# Altium PCB Watchdog PCB.PcbDoc
Units mm, origin at the board's own origin, x right, y up, seen from the top; angles counter-clockwise.
Board outline 100.02 x 60.03 mm, 4 copper layers (SIG 1, GND, PWR, SIG 2), stack 1.586 mm thick; 43 components, 51 nets, 433 pads, 105 vias.
Unrouted connection lines stored in the file: 85.
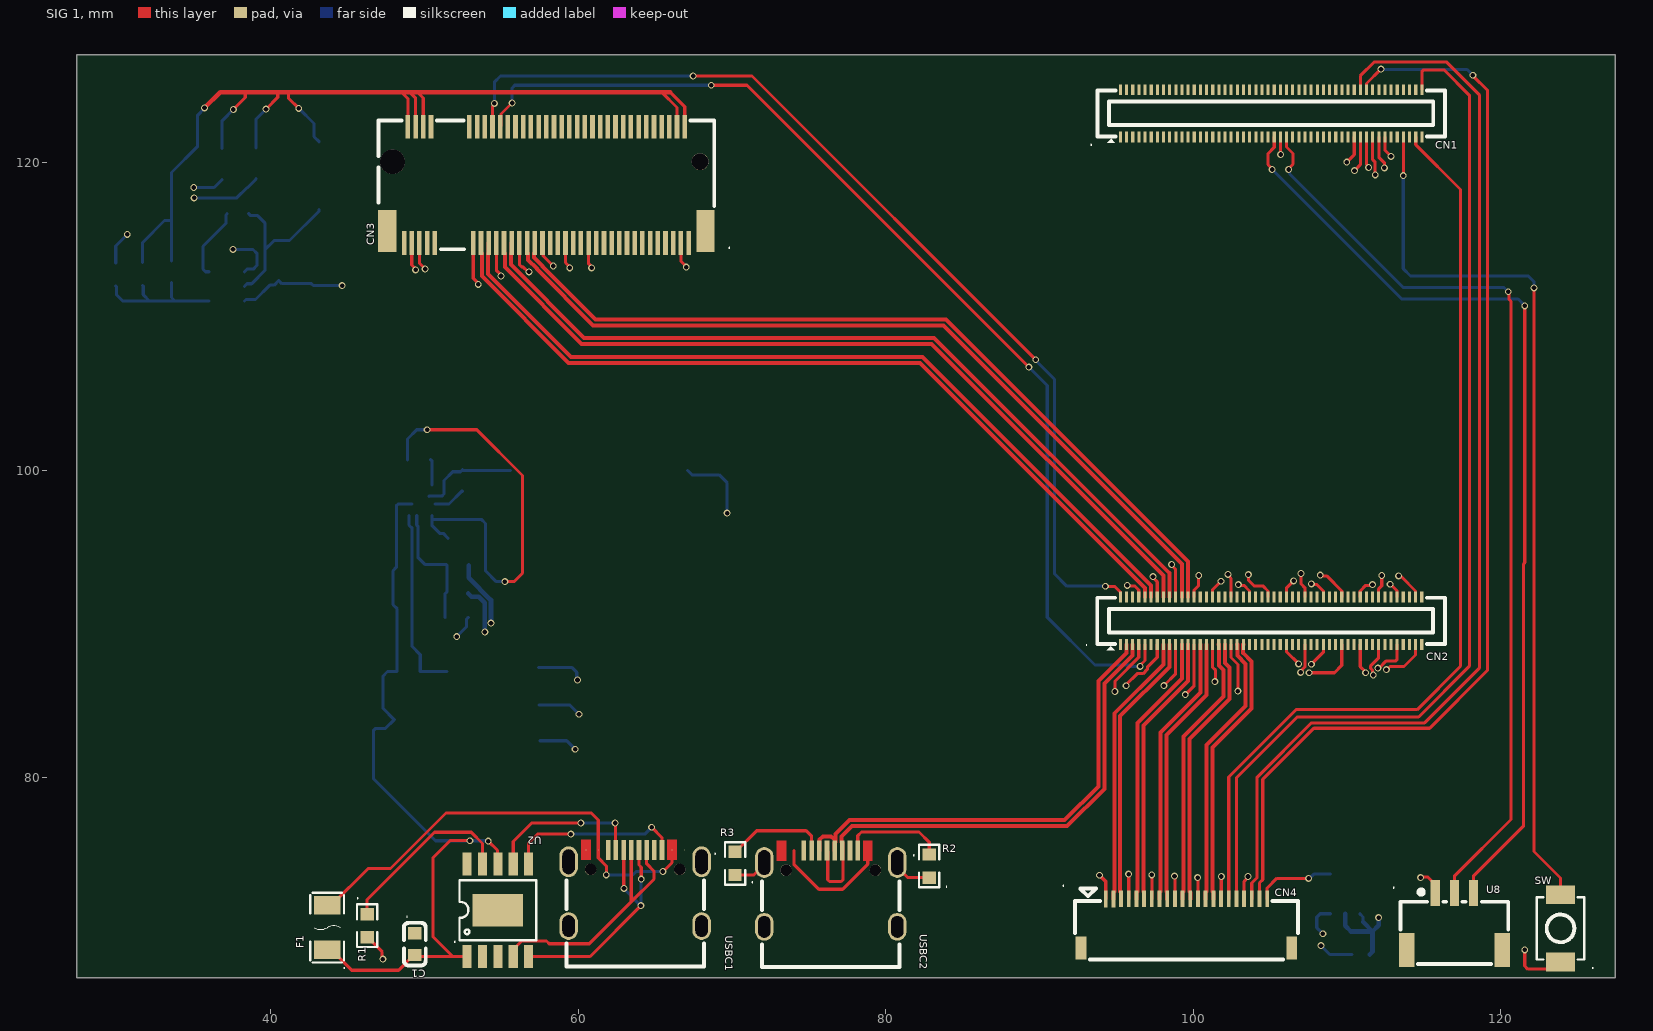
[diagram p0: SIG 1 view]
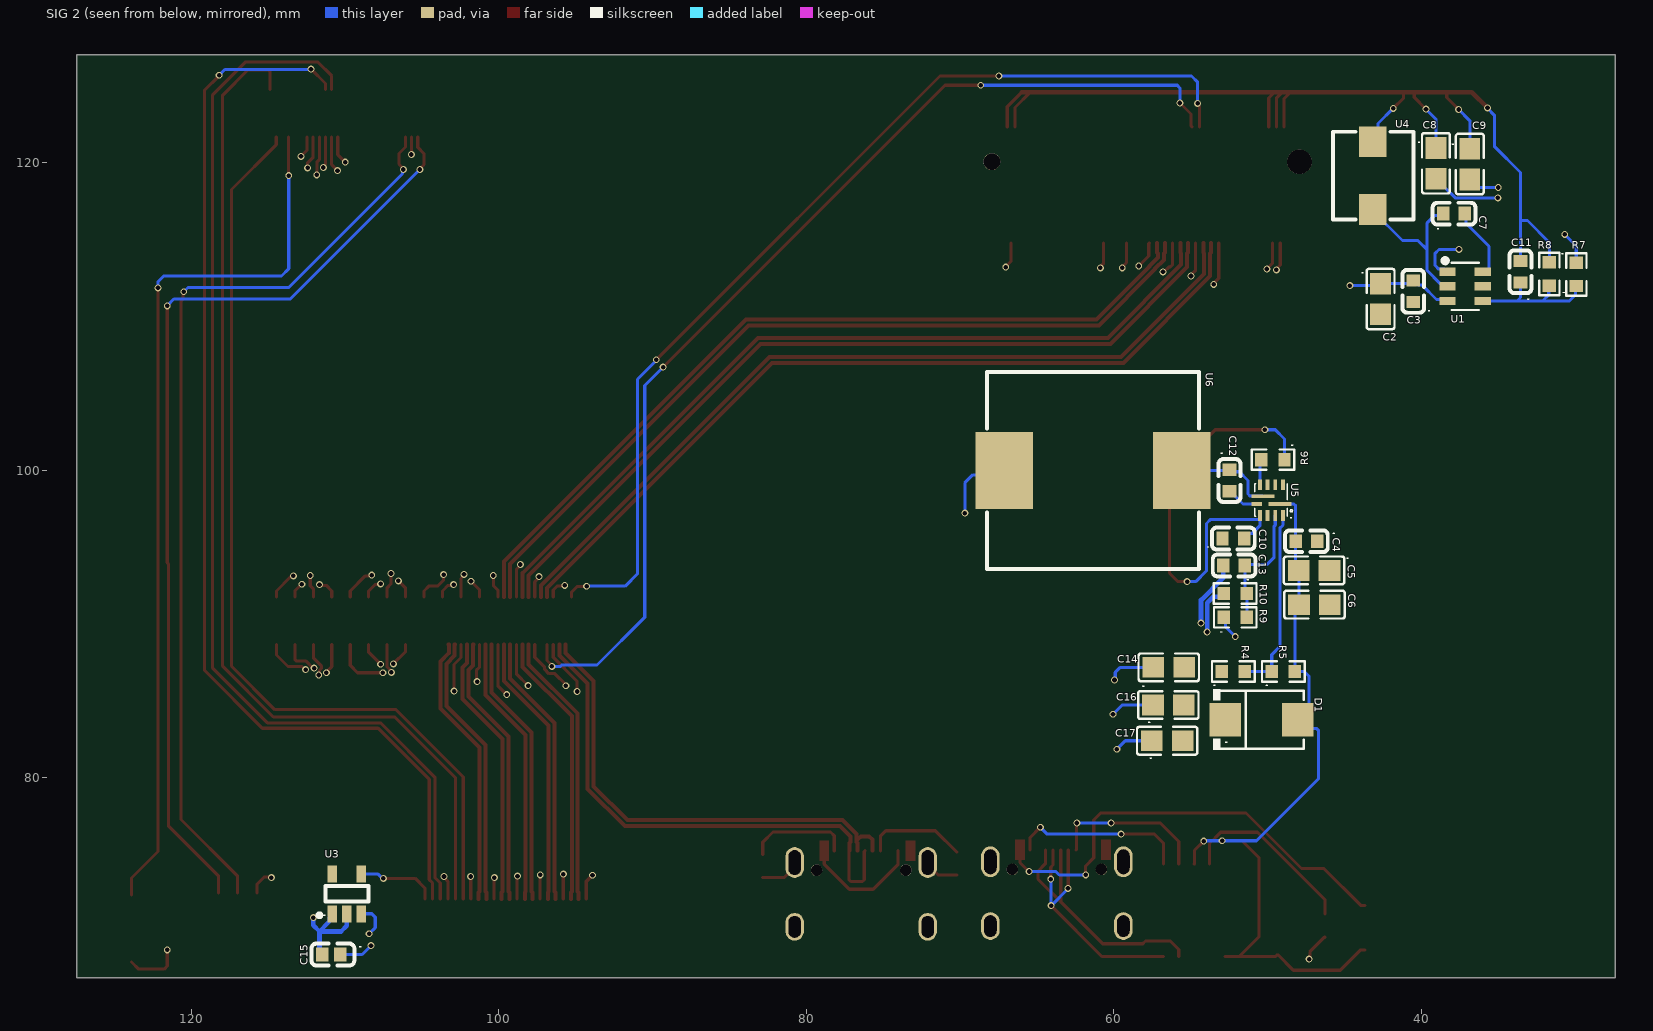
[diagram p1: SIG 2 view, seen from below]
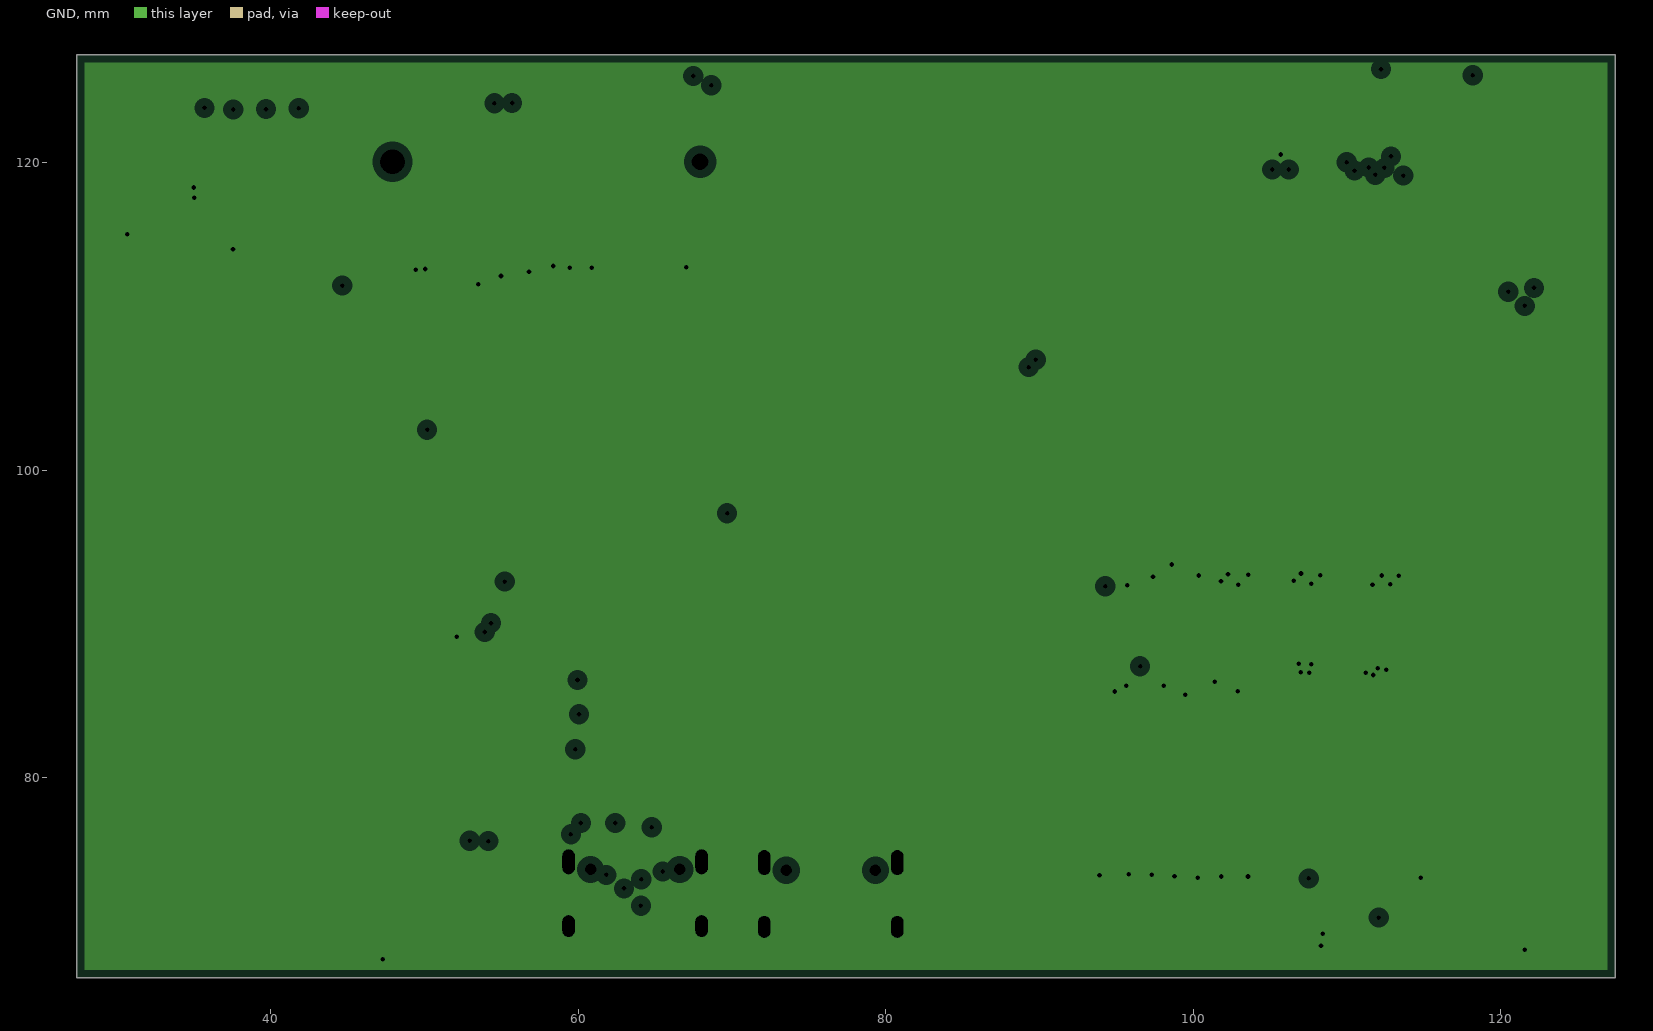
[diagram p2: GND, clearances drawn from the general rule]
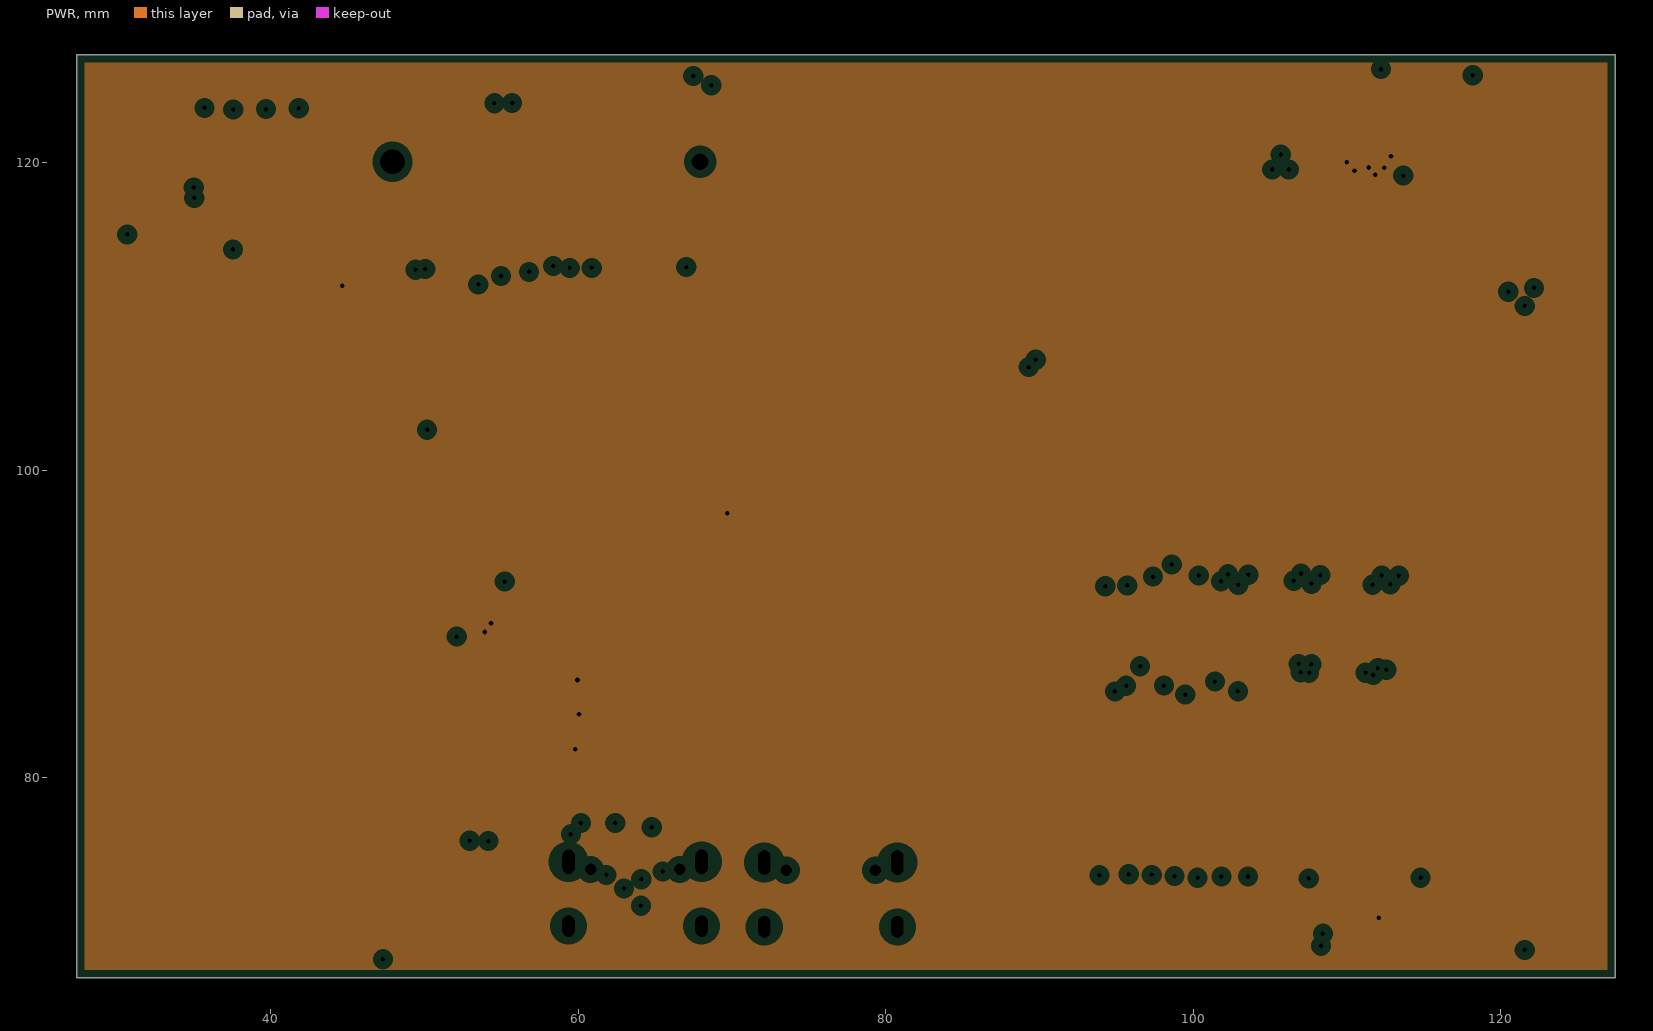
[diagram p3: PWR, clearances drawn from the general rule]
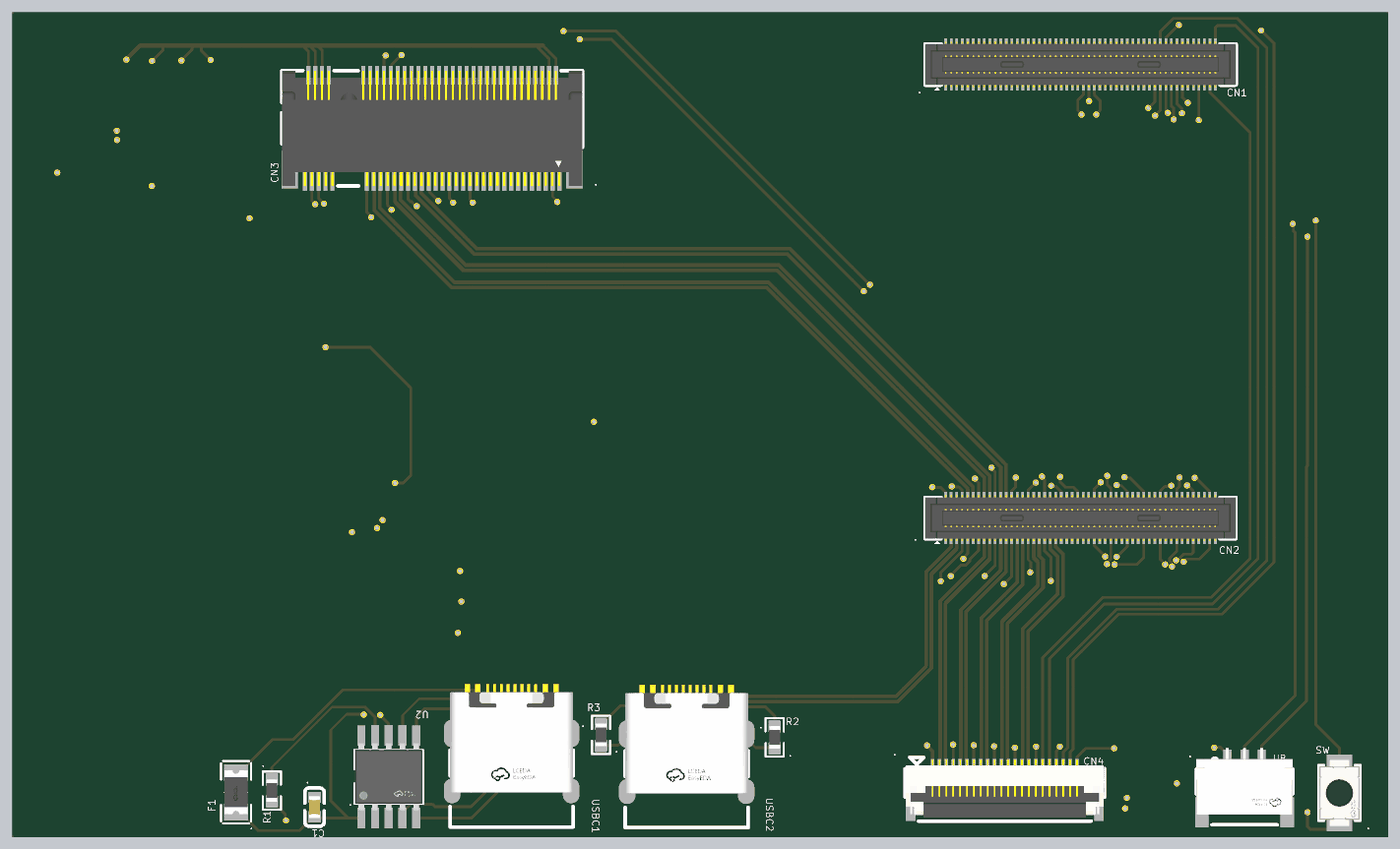
[diagram p4: 3D render of the assembled board from above, using the file's embedded part models]
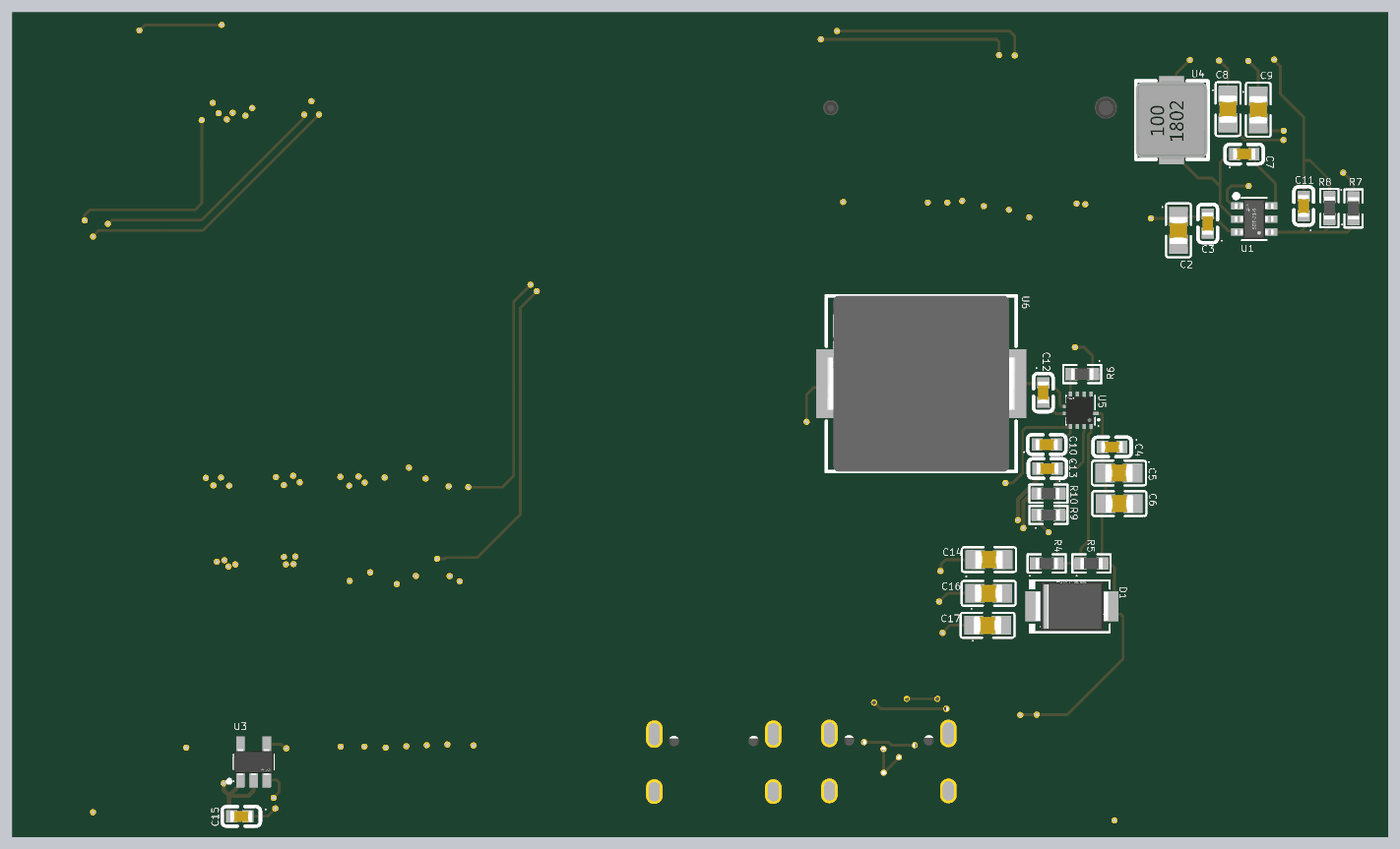
[diagram p5: 3D render of the assembled board from below, using the file's embedded part models]

## Layer stack, top to bottom
Top Solder: solder mask 0.0102, Solder Resist, Dk 3.5
SIG 1: signal copper 0.035
Dielectric 2: prepreg 0.2104, PP-006, Dk 4.1
GND: plane copper 0.0152, net GND
Dielectric 1: dielectric 1.065, FR-4, Dk 4.8
PWR: plane copper 0.0152, net 5V
Dielectric 3: prepreg 0.2104, PP-006, Dk 4.1
SIG 2: signal copper 0.035
Bottom Solder: solder mask 0.0102, Solder Resist, Dk 3.5

## Board outline
27.4,66.975 127.425,66.975 127.425,127 27.4,127

## Design rules (kind name [scope] priority, off if disabled: settings)
Clearance [All] p1: gap=0.15 ignorepadtopadclearanceinfootprint=TRUE
DiffPairsRouting USB_DiffPair [All] p1: maxlimit=0.127 minlimit=0.127 mostfreqgap=0.127 toplayer_minwidth=0.26 toplayer_maxwidth=0.26 toplayer_prefwidth=0.26 bottomlayer_minwidth=0.26 bottomlayer_maxwidth=0.26 bottomlayer_prefwidth=0.26 impedanceprofiledriven=TRUE impedanceprofileid={312E05CD-DBFE-4CD3-A864-9E920D600580} impedanceprofilevalue=90.000000 maxuncoupledlength=12.7
DiffPairsRouting [All] p2: maxlimit=0.254 minlimit=0.254 mostfreqgap=0.254 toplayer_minwidth=0.381 toplayer_maxwidth=0.381 toplayer_prefwidth=0.381 bottomlayer_minwidth=0.381 bottomlayer_maxwidth=0.381 bottomlayer_prefwidth=0.381 maxuncoupledlength=12.7
MinimumSolderMaskSliver [All] p1: minsoldermaskwidth=0.05
PlaneClearance [All] p1: clearance=0.508
PlaneConnect [All] p1: planeconnectstyle=Direct reliefexpansion=0.508 reliefentries=4 reliefconductorwidth=0.254 reliefairgap=0.254
PolygonConnect [All] p1: connectstyle=Direct reliefconductorwidth=0.254 reliefentries=4 polygonreliefangle="90 Angle" airgapwidth=0.254
RoutingVias [All] p1: holewidth=0.3 width=0.45 viastyle="Through Hole" minholewidth=0.3 minwidth=0.45 maxholewidth=0.3 maxwidth=0.6
SilkToSilkClearance [All] p1: silktosilkclearance=0.15
SilkToSolderMaskClearance [IsPad] p1: minsilkscreentomaskgap=0.1 clearancetoexposedcopper=TRUE
SolderMaskExpansion [All] p1: expansion=0 istentingtop=FALSE
SupplyNets "Schematic Supply Nets" [InNet('GND')] p1: voltage=0.000
Width [All] p1: maxlimit=0.5 minlimit=0.2 preferedwidth=0.2
24 further rules are at their usual default settings.

## Classes and differential pairs
component class USBC_Protection: C1 F1 R1 R2 R3 U2 USBC1 USBC2
component class "Power Rails": C2 C3 C4 C5 C6 C7 C8 C9 C10 C11 C12 C13 C14 C15 C16 C17 D1 R4 R5 R6 R7 R8 R9 R10 U1 U3 U4 U5 U6
component class "M.2 & CSI2": CN3 CN4
component class "Amphenol ICC": CN1 CN2 SW U8
differential pair PCIE_TX: +PCIE_TX_P -PCIE_TX_N
differential pair PCIE_RX: +PCIE_RX_P -PCIE_RX_N
differential pair PCIE_CLK: +PCIE_CLK_P -PCIE_CLK_N
differential pair CAM_D3: +CAM_D3_P -CAM_D3_N
differential pair CAM_D2: +CAM_D2_P -CAM_D2_N
differential pair CAM_D1: +CAM_D1_P -CAM_D1_N
differential pair CAM_D0: +CAM_D0_P -CAM_D0_N
differential pair CAM_CLK: +CAM_CLK_P -CAM_CLK_N
differential pair USB: +USB_P -USB_N

## Components (designator, comment, footprint, x,y, rotation, side; value= is the part's Value field where it differs from the comment)
C1 "CL10A105KB8NNNC" C0603#1 49.375,69.175 r270 top value=1uF
C2 "CL21A226MAQNNNE" C0805 42.65,111.125 r270 bottom value=22uF
C3 "CC0603KRX7R9BB104" C0603#1 40.525,111.625 r90 bottom value=100nF
C4 "C0603X7R104K250NT" C0603#1 47.475,95.375 r0 bottom value=100nF
C5 "CL21A226MAQNNNE" C0805 46.975,93.475 r0 bottom value=22uF
C6 "CL21A226MAQNNNE" C0805 46.95,91.25 r0 bottom value=22uF
C7 "CC0603KRX7R9BB104" C0603#1 37.875,116.675 r180 bottom value=100nF
C8 "CL21A226MAQNNNE" C0805 39.05,119.95 r270 bottom value=22uF
C9 "CL21A226MAQNNNE" C0805 36.85,119.9 r270 bottom value=22uF
C10 "CL10A105KB8NNNC" C0603#1 52.225,95.55 r180 bottom value=1uF
C11 "CL10C470JB8NNNC" C0603#1 33.55,112.9 r90 bottom value=47pF
C12 "CL10B224KA8NNNC" C0603#1 52.475,99.325 r270 bottom value=220nF
C13 "TCC0603COG330F500CT" C0603#1 52.175,93.8 r0 bottom value=33pF
C14 "CL21A226MAQNNNE" C0805 56.425,87.175 r180 bottom value=22uF
C15 "CL10A105KB8NNNC" C0603#2 110.775,68.5 r0 bottom value=1uF
C16 "CL21A226MAQNNNE" C0805 56.45,84.725 r180 bottom value=22uF
C17 "CL21A226MAQNNNE" C0805 56.525,82.4 r180 bottom value=22uF
CN1 "10164227-1001A1RLF" CONN-SMD_100P-P0.40_10164227-1001A1RLF 105.06,123.197 r0 top
CN2 "10164227-1001A1RLF" CONN-SMD_100P-P0.40_10164227-1001A1RLF 105.05,90.2 r0 top
CN3 "91302-42-067RDM" CONN-SMD_91302-32-067RDM 57.925,118.55 r180 top
CN4 "CSI Connector" FPC-SMD_22P-P0.50_FH55-22S-0.5SH 99.55,70.524 r0 top
D1 "TVS" SMB_L4.6-W3.6-LS5.3-RD 50.4,83.775 r180 bottom
F1 "Fuse" F1206 43.675,70.25 r90 top
R1 "CQ03WAJ0682T5E" R0603 46.275,70.378 r270 top value=6.8k
R2 "0603WAF5101T5E" R0603 82.825,74.25 r90 top value=5.1K
R3 "0603WAF5101T5E" R0603 70.2,74.425 r90 top value=5.1K
R4 "0603WAF1003T5E" R0603 52.228,86.9 r180 bottom value=100k
R5 "0603WAF4533T5E" R0603 48.975,86.9 r180 bottom value=453k
R6 "0603WAF1003T5E" R0603 49.65,100.675 r0 bottom value=100k
R7 "RT0603BRD0722K1L" R0603 29.925,112.725 r270 bottom value=22.1k
R8 "0603WAF1003T5E" R0603 31.675,112.75 r90 bottom value=100k
R9 "FRQ0603F5491TS" R0603 52.1,90.425 r180 bottom value=5.49k
R10 "0603WAF4022T5E" R0603 52.103,91.975 r0 bottom value=40.2k
SW "TS-1088R-02026" SW-SMD_L3.9-W3.0-P4.45 123.875,70.2 r270 top
U1 "TPS54302DDCR" SOT-23-6_L2.9-W1.6-P0.95-LS2.8-BL 37.15,111.95 r270 bottom
U2 "CH224A" ESSOP-10_L4.9-W3.9-P1.0-LS6.0-TL-EP 54.775,71.375 r0 top
U3 "AP2112K-3.3TRG1" SOT-25-5_L2.9-W1.6-P0.95-LS2.8-BL 109.875,72.45 r180 bottom
U4 "CXP0530-6R8M-AG(6.8uh)" IND-SMD_L5.7-W5.2 43.15,119.15 r90 bottom value=6.8uH
U5 "MP2329GG-Z" QFN-11_L2.0-W2.0-P0.50_MP2384CGG-Z 49.851,98.05 r0 bottom
U6 "CYA1250-3.3UH" IND-SMD_L13.8-W12.8 61.35,99.975 r0 bottom value=3.3uH
U8 "UART" CONN-TH_SM03B-GHS-TB-LF-SN 116.975,70.65 r0 top
USBC1 "TYPE-C-31-M-12" USB-C_SMD-TYPE-C-31-M-12_1 63.7,72.825 r0 top
USBC2 "TYPE-C-31-M-12" USB-C_SMD-TYPE-C-31-M-12_1 76.425,72.775 r0 top

## Footprints (in the part's own frame and the unit in brackets; to place one, negate y for a bottom-side part, rotate by r counter-clockwise, add the part's x,y. Pads: shape width x height; smd on the part's side, far side on the other; paste and mask are expansions set on the pad)
C0603#1 [mm] "1uF ±10% 50V Ceramic Capacitor X5R 0603"
  rect 0.8x0.9 smd: 1(-0.7,0) 2(0.7,0)
  silkscreen extent -1.81,-0.71 1.39,0.71, body extent -1.3,-0.53 0.3,0.27, height 0.03
C0603#2 [mm] "1uF ±10% 50V Ceramic Capacitor X5R 0603"
  rect 0.8x0.9 smd: 1(-0.475,0) 2(0.7,0)
  silkscreen extent -1.81,-0.71 1.39,0.71, body extent -0.8,-0.4 0.8,0.4, height 0.4
C0805 [mm] "22uF ±20% 25V Ceramic Capacitor X5R 0805"
  rect 1.41x1.35 smd: 1(-1,0) 2(1,0)
  silkscreen extent -1.96,-1.2 1.96,0.9, body extent -1,-0.65 1,0.65, height 0.65
CONN-SMD_100P-P0.40_10164227-1001A1RLF [mm] "100 Position Board to Board Connector Surface Mount,P=0.4mm Gold"
  rect 0.2x0.7 smd: 1(-9.8,-1.54) 2(-9.8,1.54) 3(-9.4,-1.54) 4(-9.4,1.54) 5(-9,-1.54) 6(-9,1.54) 7(-8.6,-1.54) 8(-8.6,1.54) 9(-8.2,-1.54) 10(-8.2,1.54) 11(-7.8,-1.54) 12(-7.8,1.54) 13(-7.4,-1.54) 14(-7.4,1.54) 15(-7,-1.54) 16(-7,1.54) 17(-6.6,-1.54) 18(-6.6,1.54) 19(-6.2,-1.54) 20(-6.2,1.54) 21(-5.8,-1.54) 22(-5.8,1.54) 23(-5.4,-1.54) 24(-5.4,1.54) 25(-5,-1.54) 26(-5,1.54) 27(-4.6,-1.54) 28(-4.6,1.54) 29(-4.2,-1.54) 30(-4.2,1.54) 31(-3.8,-1.54) 32(-3.8,1.54) 33(-3.4,-1.54) 34(-3.4,1.54) 35(-3,-1.54) 36(-3,1.54) 37(-2.6,-1.54) 38(-2.6,1.54) 39(-2.2,-1.54) 40(-2.2,1.54) 41(-1.8,-1.54) 42(-1.8,1.54) 43(-1.4,-1.54) 44(-1.4,1.54) 45(-1,-1.54) 46(-1,1.54) 47(-0.6,-1.54) 48(-0.6,1.54) 49(-0.2,-1.54) 50(-0.2,1.54) 51(0.2,-1.54) 52(0.2,1.54) 53(0.6,-1.54) 54(0.6,1.54) 55(1,-1.54) 56(1,1.54) 57(1.4,-1.54) 58(1.4,1.54) 59(1.8,-1.54) 60(1.8,1.54) 61(2.2,-1.54) 62(2.2,1.54) 63(2.6,-1.54) 64(2.6,1.54) 65(3,-1.54) 66(3,1.54) 67(3.4,-1.54) 68(3.4,1.54) 69(3.8,-1.54) 70(3.8,1.54) 71(4.2,-1.54) 72(4.2,1.54) 73(4.6,-1.54) 74(4.6,1.54) 75(5,-1.54) 76(5,1.54) 77(5.4,-1.54) 78(5.4,1.54) 79(5.8,-1.54) 80(5.8,1.54) 81(6.2,-1.54) 82(6.2,1.54) 83(6.6,-1.54) 84(6.6,1.54) 85(7,-1.54) 86(7,1.54) 87(7.4,-1.54) 88(7.4,1.54) 89(7.8,-1.54) 90(7.8,1.54) 91(8.2,-1.54) 92(8.2,1.54) 93(8.6,-1.54) 94(8.6,1.54) 95(9,-1.54) 96(9,1.54) 97(9.4,-1.54) 98(9.4,1.54) 99(9.8,-1.54) 100(9.8,1.54)
  silkscreen extent -11.74,-2.08 11.3,1.5, body extent -11.3,-1.69 11.3,1.69, height 0.03
CONN-SMD_91302-32-067RDM [mm] "67P Surface Mount, Right Angle SMD,P=0.5mm Centronics Connectors RoHS"
  rect 0.3x1.55 smd: 1(-9.25,3.775) 2(-9,-3.775) 3(-8.75,3.775) 4(-8.5,-3.775) 5(-8.25,3.775) 6(-8,-3.775) 7(-7.75,3.775) 8(-7.5,-3.775) 9(-7.25,3.775) 10(-7,-3.775) 11(-6.75,3.775) 12(-6.5,-3.775) 13(-6.25,3.775) 14(-6,-3.775) 15(-5.75,3.775) 16(-5.5,-3.775) 17(-5.25,3.775) 18(-5,-3.775) 19(-4.75,3.775) 20(-4.5,-3.775) 21(-4.25,3.775) 22(-4,-3.775) 23(-3.75,3.775) 24(-3.5,-3.775) 25(-3.25,3.775) 26(-3,-3.775) 27(-2.75,3.775) 28(-2.5,-3.775) 29(-2.25,3.775) 30(-2,-3.775) 31(-1.75,3.775) 32(-1.5,-3.775) 33(-1.25,3.775) 34(-1,-3.775) 35(-0.75,3.775) 36(-0.5,-3.775) 37(-0.25,3.775) 38(0,-3.775) 39(0.25,3.775) 40(0.5,-3.775) 41(0.75,3.775) 42(1,-3.775) 43(1.25,3.775) 44(1.5,-3.775) 45(1.75,3.775) 46(2,-3.775) 47(2.25,3.775) 48(2.5,-3.775) 49(2.75,3.775) 50(3,-3.775) 51(3.25,3.775) 52(3.5,-3.775) 53(3.75,3.775) 54(4,-3.775) 55(4.25,3.775) 56(4.5,-3.775) 57(4.75,3.775) 58(5,-3.775) 67(7.25,3.775) 68(7.5,-3.775) 69(7.75,3.775) 70(8,-3.775) 71(8.25,3.775) 72(8.5,-3.775) 73(8.75,3.775) 74(9,-3.775) 75(9.25,3.775)
  rect 1.2x2.75 smd: 76(-10.35,3) 76(10.35,3)
  round 1.1 hole 1.1 unplated: ""(-10,-1.5)
  round 1.6 hole 1.6 unplated: ""(10,-1.5)
  silkscreen extent -11.93,-4.19 10.92,4.19, body extent -10.92,-4.23 10.92,4.12, height 0.7
CONN-TH_SM03B-GHS-TB-LF-SN [mm] "Connector Header 3 position 1.25mm Pitch 1A Surface Mount, Right Angle -25?~+85?"
  rect 0.6x1.7 smd: 1(-1.25,1.854) 2(0,1.854) 3(1.25,1.854)
  rect 1x2.2 smd: 4(3.1,-1.854) 5(-3.1,-1.854)
  silkscreen extent -3.98,-2.77 3.5,2.23, body extent -3.5,-2.77 3.5,2.08, height 0.03
ESSOP-10_L4.9-W3.9-P1.0-LS6.0-TL-EP [mm] "Power Receiver Controller 1C 140W ESSOP-10 Power Management - Specialized RoHS"
  rect 0.6x1.5 smd: 1(-2,-3) 2(-1,-3) 3(0,-3) 4(1,-3) 5(2,-3) 6(2,3) 7(1,3) 8(0,3) 9(-1,3) 10(-2,3)
  rect 3.3x2.1 smd: 11(0,0)
  silkscreen extent -2.83,-2.08 2.5,1.95, body extent -2.45,-3 2.45,3, height 0.73
F1206 [mm] "3A Fuse Surface Mount 1206"
  rect 1.19x1.728 smd: 1(-1.445,0) 2(1.445,0)
  silkscreen extent -2.65,-1.13 2.27,1.09, body extent -1.6,-0.85 1.6,0.85, height 0.03
FPC-SMD_22P-P0.50_FH55-22S-0.5SH [mm] "Flip-Top -55?~+85? 22P 0.5mm 500mA 50V Gold Surface Mount, Right Angle Phosphor bronze SMD,P=0.5mm FFC, FPC (Flat Flexible) Connector Assemblies RoHS"
  rect 0.7x1.5 smd: 0(-6.85,-1.601) 0(6.85,-1.601)
  rect 0.25x1.1 smd: 1(-5.248,1.599) 2(-4.749,1.599) 3(-4.251,1.601) 4(-3.75,1.601) 5(-3.25,1.601) 6(-2.751,1.601) 7(-2.251,1.601) 8(-1.75,1.601) 9(-1.25,1.601) 10(-0.751,1.601) 11(-0.25,1.601) 12(0.25,1.601) 13(0.749,1.601) 14(1.25,1.601) 15(1.75,1.601) 16(2.25,1.601) 17(2.749,1.601) 18(3.25,1.601) 19(3.749,1.601) 20(4.249,1.601) 21(4.75,1.601) 22(5.25,1.601)
  silkscreen extent -8.03,-2.36 7.25,2.48, body extent -7.2,-2.35 7.2,1.9, height 0.03
IND-SMD_L5.7-W5.2 [mm] "3.5A 6.8uH ±20% 5A 70m? Molded inductor SMD,5.7x5.2mm Fixed Inductors"
  rect 2x1.8 smd: 1(-2.2,0) 2(2.2,0)
  silkscreen extent -2.88,-2.64 2.85,2.6, body extent -2.85,-2.6 2.85,2.61, height 2.8
IND-SMD_L13.8-W12.8 [mm] "20A 3.3uH ±20% 32A Molded inductor SMD,13.8x12.8mm Fixed Inductors"
  rect 3.735x5 smd: 1(-5.768,0) 2(5.768,0)
  silkscreen extent -6.93,-6.43 6.9,6.4, body extent -6.9,-6.4 6.9,6.4, height 6
QFN-11_L2.0-W2.0-P0.50_MP2384CGG-Z [mm] "QFN-11_L2.0-W2.0-P0.50_MP2384CGG-Z"
  rect 1.5x0.25 smd: 1(-0.651,0.25) 6(0.451,-0.25)
  rect 0.25x0.7 smd: 2(-0.85,-1) 3(-0.35,-1) 4(0.15,-1) 5(0.65,-1) 8(0.65,1) 9(0.15,1) 10(-0.35,1) 11(-0.85,1)
  rect 0.7x0.25 smd: 7(0.85,0.25)
  silkscreen extent -1.47,-1.06 0.98,1.18, body extent -1,-1 1,1, height 0.91
R0603 [mm] "6.8k? ±5% 100mW 0603 Thick Film Resistor AEC-Q200"
  rect 0.806x0.864 smd: 1(-0.753,0) 2(0.753,0)
  silkscreen extent -1.81,-0.66 1.39,0.66, body extent -0.4,-0.81 0.4,0.81, height 0.03
SMB_L4.6-W3.6-LS5.3-RD [mm] "21.5VC Clamp 28A@10/1000us Ipp TVS DIODE DO-214AA"
  rect 2.047x2.192 smd: 1(-2.361,0) 2(2.361,0)
  silkscreen extent -3.12,-1.96 2.74,1.96, body extent -2.7,-1.8 2.7,1.8, height 2
SOT-23-6_L2.9-W1.6-P0.95-LS2.8-BL [mm] "Buck Switching Regulator IC Adjustable 1 Output 3A TSOT-23-6"
  rect 0.532x1.072 smd: 1(-0.95,-1.149) 2(0,-1.149) 3(0.95,-1.149) 4(0.95,1.149) 5(0,1.149) 6(-0.95,1.149)
  silkscreen extent -1.82,-1.45 1.54,0.89, body extent -1.45,-1.41 1.45,1.41, height 1.6
SOT-25-5_L2.9-W1.6-P0.95-LS2.8-BL [mil] "3.3V Positive Fixed SOT-25-5 Voltage Regulators - Linear, Low Drop Out (LDO) Regulators RoHS"
  rect 24.5x43.5 smd: 1(-37.39,-51.18) 2(-0.02,-51.18) 3(37.39,-51.18) 4(37.39,51.18) 5(-37.39,51.18)
  silkscreen extent -75,-60 56,20, body extent -57,-55 57,55, height 43
SW-SMD_L3.9-W3.0-P4.45 [mm] "Tactile Switch SPST 2mm 3.9mm x 2.93mm Surface Mount"
  rect 1.23x1.86 smd: 1(-2.185,0) 2(2.185,0)
  silkscreen extent -2.03,-1.54 2.6,2.13, body extent -2.4,-1.45 2.4,1.45, height 0.03
USB-C_SMD-TYPE-C-31-M-12_1 [mm] "USB-C (USB TYPE-C) Receptacle Connector 16 Position Surface Mount"
  rrect100% 1.2x2 hole 0.8 slot 1.6 at 90 deg: 1(4.325,1.706) 4(-4.325,1.706)
  rrect100% 1.2x1.8 hole 0.8 slot 1.4 at 90 deg: 2(4.325,-2.474) 3(-4.325,-2.474)
  round 0.025 smd: A1B12(-3.2,2.474) A4B9(-2.4,2.474) B1A12(3.2,2.474) B4A9(2.4,2.474)
  rect 0.3x1.3 smd: A5(-1.25,2.474) A6(-0.25,2.474) A7(0.25,2.474) A8(1.25,2.474) B5(1.75,2.474) B6(0.75,2.474) B7(-0.75,2.474) B8(-1.75,2.474)
  round 0.75 hole 0.75 unplated: ""(-2.9,1.206) ""(2.9,1.206)
  silkscreen extent -4.47,-5.09 5.23,2.25, body extent -4.47,-5.05 4.47,2.85, height 0.85

## Part data
C1 C10 C15: "1uF ±10% 50V Ceramic Capacitor X5R 0603", Name=C15849, Source=LCSC
C2 C5 C6 C8 C9 C14 C16 C17: "22uF ±20% 25V Ceramic Capacitor X5R 0805", Name=C45783, Source=LCSC
C3 C7: "100nF ±10% 50V Ceramic Capacitor X7R 0603", Name=C14663, Source=LCSC
C11: "47pF ±5% 50V Ceramic Capacitor C0G 0603", Name=C1671, Source=LCSC
C12: "220nF ±10% 25V Ceramic Capacitor X7R 0603", Name=C21120, Source=LCSC
C13: "33pF C0G ±1% 50V 0603 Ceramic Capacitors", Name=C48543706, Source=LCSC
CN1 CN2: "100 Position Board to Board Connector Surface Mount,P=0.4mm Gold", Name=C6782225, Source=LCSC
CN3: "67P Surface Mount, Right Angle SMD,P=0.5mm Centronics Connectors RoHS", Name=C601195, Source=LCSC
CN4: library part FH55-22S-0.5SH, "Flip-Top -55â„ƒ~+85â„ƒ 22P 0.5mm 500mA 50V Gold Surface Mount, Right Angle Phosphor bronze SMD,P=0.5mm FFC, FPC (Flat Flexible) Connector Assemblies RoHS", Name=C5182313, Source=LCSC
D1: library part SMBJ12A_C151251, "21.5VC Clamp 28A@10/1000us Ipp TVS DIODE DO-214AA", Name=C151251, Source=LCSC
F1: library part 1206T3A63V, "3A Fuse Surface Mount 1206", Name=C354897, Source=LCSC
R1: "6.8kÎ© Â±5% 100mW 0603 Thick Film Resistor AEC-Q200", Name=C2770993, Source=LCSC
R2 R3: "5.1kÎ© Â±1% 100mW 0603 Thick Film Resistor", Name=C23186, Source=LCSC
R4 R6 R8: "100kÎ© Â±1% 100mW 0603 Thick Film Resistor", Name=C25803, Source=LCSC
R5: "453kÎ© Â±1% 100mW 0603 Thick Film Resistor", Name=C25818, Source=LCSC
R7: "22.1kÎ© 100mW 75V Thin Film Resistor Â±25ppm/â„ƒ Â±0.1% 0603 Chip Resistor - Surface Mount RoHS", Name=C723484, Source=LCSC
R9: "5.49kÎ© 100mW 75V Thick Film Resistor Â±100ppm/â„ƒ Â±1% 0603 Chip Resistor - Surface Mount", Name=C54102278, Source=LCSC
R10: "40.2kÎ© Â±1% 100mW 0603 Thick Film Resistor", Name=C12447, Source=LCSC
SW: "Tactile Switch SPST 2mm 3.9mm x 2.93mm Surface Mount", Name=C455280, Source=LCSC
U1: library part TPS54302DDCR_C311983, "Buck Switching Regulator IC Adjustable 1 Output 3A TSOT-23-6", Name=C311983, Source=LCSC
U2: "Power Receiver Controller 1C 140W ESSOP-10 Power Management - Specialized RoHS", Name=C42459160, Source=LCSC
U3: "3.3V Positive Fixed SOT-25-5 Voltage Regulators - Linear, Low Drop Out (LDO) Regulators RoHS", Name=C51118, Source=LCSC
U4: library part CXP0530-6R8M-AG_6.8UH, "3.5A 6.8uH Â±20% 5A 70mÎ© Molded inductor SMD,5.7x5.2mm Fixed Inductors", Name=C7461350, Source=LCSC
U6: "20A 3.3uH ±20% 32A Molded inductor SMD,13.8x12.8mm Fixed Inductors", Name=C19268654, Source=LCSC
U8: library part SM03B-GHS-TB_LF_SN, "Connector Header 3 position 1.25mm Pitch 1A Surface Mount, Right Angle -25â„ƒ~+85â„ƒ", Name=C514175, Source=LCSC
USBC1 USBC2: "USB-C (USB TYPE-C) Receptacle Connector 16 Position Surface Mount", Name=C165948, Source=LCSC
C4: Name=C466768, Source=LCSC
U5: Name=C5349327, Source=LCSC

## Via types
v1: diameter 0.45, hole 0.3, SIG 1 to SIG 2, 105 vias

## Nets (pads, with @x,y where several pads share a name; then routed paths per layer and width w, separated by ;. In a path a pad name is that pad's centre, name@x,y a point inside that pad or via, vN(x,y) a via of type N, cw(c..) or ccw(c..) an arc to the next point about the centre after c; other vN are vias at no path point)
5V: C2.1 C3.2 C13.2 C14.1 C15.2 C16.1 C17.1 CN1.77 CN1.79 CN1.81 CN1.83 CN1.85 CN1.87 R10.2 U1.3 U3.1 U3.2 U6.2 | length 47.1
  SIG 1 w0.2: v1(109.975,120.025) 110.46,120.51 CN1.77 ; v1(110.475,119.475) 110.86,119.86 CN1.79 ; CN1.81 111.26,119.883 111.4,119.743 v1(111.4,119.675) ; CN1.83 111.66,120.19 111.825,120.025 v1(111.825,119.2) ; CN1.85 112.06,120.34 112.416,119.984 112.416,119.659 v1(112.425,119.65) ; CN1.87 112.46,120.79 v1(112.85,120.4)
  SIG 2 w0.2: U1.3 38.392,111.093 39.018,111.093 39.95,112.025 40.225,112.025 C3.2 40.725,112.125 C2.1 42.775,112 v1(44.65,112) ; C14.1 59.575,87.175 59.902,86.848 59.902,86.398 v1(59.95,86.35) ; C16.1 59.45,84.725 v1(60.05,84.125) ; C17.1 59.25,82.4 v1(59.8,81.85) ; U6.2 67.403,99.69 69.168,99.69 69.682,99.175 v1(69.682,97.2) ; U3.1 111.036,70.939 U3.1@111.036,70.614
  SIG 2 w0.3: R10.2 53.058,91.773 53.527,91.773 53.925,91.375 v1(53.925,89.475) ; C13.2 52.875,93 54.325,91.55 v1(54.325,90.05) ; U3.2 109.876,70.374 110.25,70 111.65,70 ; U3.1@111.036,70.614 111.65,70 ; C15.2 111.65,68.675 111.65,70 ; v1(112.05,70.9) 112.05,70.4 111.65,70
CAM_CLK_N: CN2.27 CN4.8 | length 17.6
  SIG 1 w0.26: CN4.8 97.8,72.54 97.856,72.596 97.856,82.931 100.456,85.531 100.456,88.654 CN2.27
CAM_CLK_P: CN2.29 CN4.9 | length 17.6
  SIG 1 w0.26: CN4.9 98.3,72.54 98.243,72.596 98.243,82.771 100.844,85.371 100.844,88.654 CN2.29
CAM_D0_N: CN2.15 CN4.2 | length 17.9
  SIG 1 w0.26: CN4.2 94.801,72.537 94.856,72.592 94.856,84.166 98.056,87.367 98.056,88.654 CN2.15
CAM_D0_P: CN2.17 CN4.3 | length 17.9
  SIG 1 w0.26: CN4.3 95.299,72.54 95.243,72.595 95.243,84.006 98.444,87.206 98.444,88.654 CN2.17
CAM_D1_N: CN2.21 CN4.5 | length 17.8
  SIG 1 w0.26: CN4.5 96.3,72.54 96.356,72.596 96.356,83.543 99.256,86.444 99.256,88.654 CN2.21
CAM_D1_P: CN2.23 CN4.6 | length 17.8
  SIG 1 w0.26: CN4.6 96.799,72.54 96.743,72.596 96.743,83.382 99.644,86.283 99.644,88.654 CN2.23
CAM_D2_N: CN2.33 CN4.11 | length 17.8
  SIG 1 w0.26: CN4.11 99.299,72.54 99.356,72.596 99.356,82.681 101.95,85.275 101.95,87.015 101.656,87.308 101.656,88.654 CN2.33
CAM_D2_P: CN2.35 CN4.12 | length 17.8
  SIG 1 w0.26: CN4.12 99.8,72.54 99.743,72.596 99.743,82.521 102.337,85.115 102.337,87.175 102.044,87.469 102.044,88.654 CN2.35
CAM_D3_N: CN2.39 CN4.14 | length 17.8
  SIG 1 w0.26: CN4.14 100.799,72.54 100.856,72.596 100.856,82.129 103.4,84.673 103.4,87.399 102.856,87.943 102.856,88.654 CN2.39
CAM_D3_P: CN2.41 CN4.15 | length 17.8
  SIG 1 w0.26: CN4.15 101.3,72.54 101.243,72.596 101.243,81.968 103.787,84.512 103.787,87.56 103.244,88.103 103.244,88.654 CN2.41
GND: C1.1 C2.2 C3.1 C4.1 C5.1 C6.1 C8.2 C9.2 C10.1 C14.2 C15.1 C16.2 C17.2 CN1.1 CN1.2 CN1.7 CN1.8 CN1.13 CN1.14 CN1.22 CN1.23 CN1.32 CN1.33 CN1.42 CN1.43 CN1.52 CN1.53 CN1.59 CN1.60 CN1.65 CN1.66 CN1.71 CN1.74 CN1.98 CN2.7 CN2.8 CN2.13 CN2.14 CN2.19 CN2.20 CN2.25 CN2.26 CN2.31 CN2.32 CN2.37 CN2.38 CN2.44 CN2.50 CN2.55 CN2.56 CN2.61 CN2.62 CN2.67 CN2.68 CN2.73 CN2.74 CN2.79 CN2.80 CN2.85 CN2.86 CN2.91 CN2.92 CN2.97 CN2.98 CN3.3 CN3.27 CN3.33 CN3.39 CN3.45 CN3.51 CN3.57 CN3.71 CN3.73 CN4.1 CN4.4 CN4.7 CN4.10 CN4.13 CN4.16 CN4.19 D1.1 R1.2 R2.1 R3.1 R4.1 R7.1 R9.1 SW.2 U1.1 U2.11 U3.3 U5.2 U5.3 U5.4 U5.9 U8.1 USBC1.1 USBC1.2 USBC1.3 USBC1.4 USBC1.A1B12 USBC1.B1A12 USBC2.1 USBC2.2 USBC2.3 USBC2.4 USBC2.A1B12 USBC2.B1A12 | length 123.8
  SIG 1 w0.2: R1.2 46.304,69.625 47.252,68.677 47.252,68.248 v1(47.3,68.2) ; CN3.73 49.175,113.343 49.425,113.093 v1(49.425,113.025) ; CN3.71 49.675,113.45 v1(50.05,113.075) ; CN3.57 53.175,112.468 53.5,112.143 v1(53.5,112.075) ; CN3.51 54.675,112.993 54.975,112.693 v1(54.975,112.625) ; CN3.45 56.175,113.368 56.324,113.219 56.402,113.219 56.732,112.888 v1(56.8,112.888) ; CN3.39 57.725,114.725 57.725,113.925 v1(58.375,113.275) ; CN3.33 59.175,113.493 59.45,113.218 v1(59.45,113.15) ; CN3.27 60.675,113.418 60.875,113.218 v1(60.875,113.15) ; CN3.3 66.675,113.593 67.025,113.243 v1(67.025,113.2) ; R3.1 71.42,73.672 72.1,74.351 USBC2.4 ; USBC2.1 80.75,74.185 81.439,73.497 R2.1 ; v1(94.9,85.6) 94.9,86.275 96.45,87.825 CN2.7 ; v1(95.625,85.975) 95.625,86.043 96.346,86.764 96.733,86.764 97.011,87.042 97.011,87.186 97.65,87.825 CN2.13 ; v1(95.7,92.5) 95.748,92.452 96.203,92.452 96.45,92.205 CN2.8 ; v1(95.795,73.725) 95.799,73.72 CN4.4 ; v1(97.294,73.675) 97.299,73.67 CN4.7 ; v1(97.378,93.078) 97.378,93.01 97.65,92.737 CN2.14 ; v1(98.087,85.988) 98.85,86.752 CN2.19 ; v1(98.588,93.863) 98.588,93.796 98.85,93.534 CN2.20 ; v1(98.775,73.6) 98.799,73.576 CN4.10 ; v1(99.475,85.4) 100.05,85.975 CN2.25 ; CN2.26 100.05,92.198 100.329,92.477 100.329,93.129 v1(100.35,93.15) ; v1(100.275,73.5) 100.299,73.476 CN4.13 ; CN2.31 101.25,87.177 101.448,86.979 101.448,86.298 v1(101.4,86.25) ; CN2.32 101.25,92.225 v1(101.8,92.775) ; CN4.16 101.812,72.137 101.812,73.563 v1(101.824,73.575) ; v1(102.25,93.225) 102.25,93.157 102.45,92.957 CN2.38 ; CN2.37 102.45,87.812 102.9,87.362 102.9,85.63 v1(102.895,85.625) ; v1(102.925,92.55) 102.973,92.502 103.291,92.502 103.65,92.144 CN2.44 ; CN4.19 103.299,73.256 103.55,73.507 v1(103.55,73.575) ; v1(103.575,93.2) 103.575,92.85 103.975,92.45 104.543,92.45 104.85,92.144 CN2.50 ; CN1.53 105.66,120.54 v1(105.675,120.525) ; CN2.55 106.05,88.2 v1(106.85,87.4) ; CN2.56 106.05,92.325 v1(106.525,92.8) ; v1(106.975,86.85) 106.975,86.918 107.25,87.193 CN2.61 ; v1(107,93.275) 107,92.603 107.25,92.353 CN2.62 ; v1(107.525,86.825) 109.175,86.825 109.65,87.3 CN2.73 ; v1(107.675,87.375) 108.45,88.15 CN2.67 ; v1(107.675,92.6) 107.723,92.552 108.042,92.552 108.45,92.144 CN2.68 ; v1(108.25,93.175) 108.298,93.127 108.666,93.127 109.65,92.144 CN2.74 ; CN2.79 110.85,87.217 111.2,86.867 v1(111.2,86.825) ; CN2.80 110.85,92.144 111.209,92.502 111.602,92.502 v1(111.65,92.55) ; v1(111.7,86.675) 111.652,86.723 111.652,86.99 111.525,87.118 111.525,87.275 112.05,87.8 CN2.85 ; v1(112,87.125) 112.068,87.125 112.518,87.575 113.133,87.575 113.25,87.692 CN2.91 ; CN2.86 112.05,92.278 112.25,92.478 v1(112.25,93.15) ; v1(112.55,87.025) 112.592,87.025 112.792,87.225 113.7,87.225 114.45,87.975 CN2.97 ; v1(112.8,92.575) 112.819,92.575 113.25,92.144 CN2.92 ; v1(113.35,93.125) 113.398,93.077 113.516,93.077 114.45,92.144 CN2.98 ; v1(114.775,73.5) 114.812,73.537 115.242,73.537 115.725,73.054 U8.1 ; v1(121.55,68.8) 121.55,67.75 121.75,67.55 123.41,67.55 SW.2
  SIG 1 w0.25: v1(93.9,73.657) 94.302,73.255 CN4.1
  SIG 2 w0.2: R7.1 29.925,114.575 v1(30.675,115.325) ; v1(35,118.375) 36.325,118.375 C9.2 ; v1(35.025,117.7) 37.8,117.7 38.445,118.345 38.475,118.345 39.05,118.92 C8.2 ; v1(37.55,114.35) 38.85,114.35 39.1,114.1 39.1,113.3 38.866,113.066 38.465,113.066 U1.1 ; v1(52.1,89.175) 52.735,89.81 52.735,90.307 R9.1 ; v1(108.3,69.075) 108.875,68.5 C15.1 ; v1(108.425,69.85) 108.025,70.25 108.025,70.925 108.25,71.15 U3.3
NetC1_2: C1.2 C4.2 C5.2 C6.2 D1.2 F1.1 R5.2 U2.1 U2.8 U5.1 | length 51.9
  SIG 1 w0.2: F1.1 43.944,68.805 45.274,67.475 48.325,67.475 49.325,68.475 C1.2 49.475,68.375 51.844,68.375 ; U2.1 51.844,68.375 ; v1(52.95,75.9) 52.925,75.925 51.7,75.925 50.55,74.775 50.55,69.669 51.844,68.375 ; v1(54.15,75.875) 54.75,75.275 54.75,74.4 U2.8
  SIG 2 w0.2: U5.1 48.292,97.8 48.175,97.683 C4.2 48.175,93.675 47.95,93.45 C6.2 48.222,90.978 R5.2 47.6,86.9 47.3,86.6 47.3,84.514 D1.2 47.472,83.208 46.833,83.208 46.675,83.05 46.675,79.95 50.725,75.9 v1(52.95,75.9) 54.125,75.9 v1(54.15,75.875)
NetC7_1: C7.1 U1.2 U4.1 | length 10.8
  SIG 2 w0.2: U1.2 38.465,112.116 38.766,112.116 39.625,112.975 39.625,114.325 ; C7.1 38.708,116.542 39.158,116.542 39.625,116.075 39.625,114.325 ; U4.1 43.15,116.85 41.225,114.925 40.225,114.925 39.625,114.325
NetC7_2: C7.2 U1.6 | length 4.7
  SIG 2 w0.2: U1.6 35.766,112.9 35.6,113.066 35.6,114.55 37.092,116.042 37.092,116.592 C7.2
NetC8_1: C8.1 C9.1 C11.2 CN3.2 CN3.4 CN3.70 CN3.72 CN3.74 R8.2 U4.2 | length 70.4
  SIG 1 w0.2: v1(37.575,123.45) 38.35,124.225 38.35,124.575 ; v1(39.7,123.475) 40.461,124.236 40.461,124.575 ; 41.154,124.575 41.154,124.196 v1(41.825,123.525) ; 48.517,124.575 48.925,124.167 CN3.74 ; 49.033,124.575 49.425,124.183 CN3.72 ; 49.549,124.575 49.925,124.199 CN3.70 ; 65.433,124.575 66.425,123.583 CN3.4 ; 65.975,124.575 66.925,123.625 CN3.2
  SIG 1 w0.3: v1(35.7,123.55) 36.725,124.575 38.35,124.575 40.461,124.575 41.154,124.575 48.517,124.575 49.033,124.575 49.549,124.575 65.433,124.575 65.975,124.575
  SIG 2 w0.2: R8.2 31.675,114.8 33.1,116.225 33.55,116.225 ; C11.2 33.55,116.225 ; v1(35.7,123.55) 35.7,123.525 35.25,123.075 35.25,121.05 33.55,119.35 33.55,116.225 ; C9.1 36.85,122.725 v1(37.575,123.45) ; C8.1 39.05,122.825 v1(39.7,123.475) ; v1(41.825,123.525) 42.817,122.533 42.817,121.683 U4.2
NetC10_2: C10.2 R6.1 U5.8 | length 28.5
  SIG 1 w0.2: v1(50.175,102.625) 53.4,102.625 56.375,99.65 56.375,93.3 55.825,92.75 v1(55.225,92.75)
  SIG 2 w0.2: R6.1 48.897,102.022 49.5,102.625 v1(50.175,102.625) ; C10.2 51.525,95.587 51.225,95.887 50.988,95.887 50.501,96.374 U5.8 50.501,96.825 50.526,96.8 53.7,96.8 53.975,96.525 53.975,93.45 54.675,92.75 v1(55.225,92.75)
NetC11_1: C11.1 R7.2 R8.1 U1.4 | length 9.3
  SIG 2 w0.2: R7.2 29.989,111.907 29.989,111.386 30.375,111 32.125,111 ; R8.1 31.714,111.957 31.714,111.411 32.125,111 ; C11.1 33.55,111.225 33.775,111 ; U1.4 33.775,111 ; 32.125,111 33.775,111
NetC12_1: C12.1 U5.6 U6.1 | length 6.5
  SIG 2 w0.2: U5.6 50.327,98.325 51.158,98.325 51.275,98.442 51.275,99.325 51.842,99.892 52.342,99.892 C12.1 52.525,99.975 U6.1
NetC12_2: C12.2 U5.7 | length 2.1
  SIG 2 w0.2: U5.7 51.6,97.8 52.425,98.625 C12.2
NetC13_1: C13.1 R9.2 R10.1 U5.10 | length 8.3
  SIG 2 w0.2: U5.10 49.501,96.424 49.575,96.35 49.575,94.325 50.025,93.875 51.4,93.875 C13.1 51.475,92.1 R10.1 51.35,90.428 R9.2
NetCN1_51: CN1.51 U8.3 | length 62
  SIG 1 w0.2: v1(105.125,119.55) 105.125,119.584 104.85,119.859 104.85,120.575 105.26,120.985 CN1.51 ; U8.3 118.225,73.625 121.475,76.875 121.475,93.904 121.55,93.979 v1(121.55,110.675)
  SIG 2 w0.2: v1(105.125,119.55) 113.55,111.125 121.116,111.125 121.55,110.691 v1(121.55,110.675)
NetCN1_55: CN1.55 U8.2 | length 60.8
  SIG 1 w0.2: CN1.55 106.06,121.007 106.477,120.59 106.477,119.895 106.2,119.618 v1(106.2,119.55) ; U8.2 116.975,73.6 120.65,77.275 120.65,110.975 120.523,111.102 120.523,111.552 v1(120.475,111.6)
  SIG 2 w0.2: v1(106.2,119.55) 106.248,119.502 106.248,119.277 113.65,111.875 120.2,111.875 v1(120.475,111.6)
NetCN1_78: CN1.78 CN1.84 CN1.86
NetCN1_80: CN1.80 CN4.20 | length 72.6
  SIG 1 w0.2: CN4.20 103.799,73.152 104.125,73.478 104.125,80 107.688,83.563 115.038,83.563 118.6,87.125 118.6,124.4 116.45,126.55 111.775,126.55 110.86,125.635 CN1.80
NetCN1_82: CN1.82 CN4.21 | length 72.4
  SIG 1 w0.2: CN4.21 104.299,73.158 104.51,73.368 104.51,79.89 107.832,83.213 115.363,83.213 119.125,86.975 119.125,124.7 118.175,125.65 v1(118.175,125.675) ; CN1.82 111.26,125.14 112.195,126.075 v1(112.2,126.075)
  SIG 2 w0.2: v1(112.2,126.075) 112.225,126.05 117.8,126.05 v1(118.175,125.675)
NetCN1_93: CN1.93 SW.1 | length 58
  SIG 1 w0.2: v1(113.65,119.15) 113.66,119.16 CN1.93 ; v1(122.15,111.85) 122.15,75.2 123.875,73.475 SW.1
  SIG 2 w0.2: v1(113.65,119.15) 113.65,113.1 114.125,112.625 121.775,112.625 122.15,112.25 v1(122.15,111.85)
NetCN1_97: CN1.97 CN4.17 | length 61.6
  SIG 1 w0.2: CN4.17 102.299,80.049 106.675,84.425 114.55,84.425 117.375,87.25 117.375,118.25 114.46,121.165 CN1.97
NetCN1_100: CN1.100 CN4.18 | length 68.1
  SIG 1 w0.2: CN4.18 102.8,80 106.75,83.95 114.65,83.95 117.95,87.25 117.95,124.375 116.3,126.025 114.977,126.025 114.86,125.908 CN1.100
NetCN2_2: CN2.2 CN3.52 | length 65.5
  SIG 1 w0.2: CN3.52 54.425,123.657 54.55,123.782 v1(54.55,123.85) ; v1(67.475,125.625) 71.3,125.625 v1(89.75,107.175) ; v1(94.275,92.45) 94.3,92.425 94.9,92.425 95.25,92.075 CN2.2
  SIG 2 w0.2: v1(54.55,123.85) 54.55,125.225 54.95,125.625 v1(67.475,125.625) ; v1(89.75,107.175) 89.75,107.125 90.975,105.9 90.975,93.25 91.775,92.45 v1(94.275,92.45)
NetCN2_9: CN2.9 CN3.50 | length 69.8
  SIG 1 w0.2: CN3.50 54.975,122.375 54.975,123.154 55.696,123.875 v1(55.7,123.875) ; v1(68.65,125.025) 70.975,125.025 v1(89.3,106.7) ; v1(96.536,87.239) 96.536,87.307 96.85,87.621 CN2.9
  SIG 2 w0.2: v1(55.7,123.875) 55.7,124.85 55.875,125.025 v1(68.65,125.025) ; v1(89.3,106.7) 90.5,105.5 90.5,90.425 93.6,87.325 95.898,87.325 95.984,87.239 v1(96.536,87.239)
NetCN4_22: CN4.22 U3.4 | length 5.2
  SIG 1 w0.2: CN4.22 104.8,72.825 105.425,73.45 v1(107.5,73.45)
  SIG 2 w0.2: v1(107.5,73.45) 107.568,73.45 107.868,73.75 U3.4
NetF1_2: F1.2 USBC1.A4B9 USBC1.B4A9 | length 29.5
  SIG 1 w0.2: F1.2 43.944,71.695 46.338,74.089 47.794,74.089 51.405,77.7 60.85,77.7 61.3,77.25 USBC1.A4B9 61.3,74.783 61.825,74.258 v1(61.825,73.675) ; v1(65.5,73.9) 65.525,73.9 66.1,74.475 USBC1.B4A9
  SIG 2 w0.2: v1(61.825,73.675) 63.539,73.675 63.764,73.9 v1(65.5,73.9)
NetR1_1: R1.1 U2.9 | length 11.9
  SIG 1 w0.2: R1.1 46.275,72.075 50.65,76.45 53.05,76.45 53.775,75.725 U2.9
NetR2_2: R2.2 USBC2.B5 | length 6.8
  SIG 1 w0.2: USBC2.B5 78.175,76.225 78.42,76.47 82.155,76.47 82.825,75.8 R2.2
NetR3_2: R3.2 USBC2.A5 | length 6.6
  SIG 1 w0.2: R3.2 70.229,75.178 71.6,76.55 74.825,76.55 75.175,76.2 USBC2.A5
NetR4_2: R4.2 R5.1 U5.11 | length 12.2
  SIG 2 w0.2: U5.11 49.001,96.424 49.2,96.225 49.2,88.525 49.728,87.997 R5.1 R4.2
NetR6_2: R6.2 U5.5 | length 1.7
  SIG 2 w0.2: R6.2 50.501,100.577 U5.5
NetU2_4: U2.4 USBC1.A6 USBC1.B6 | length 17.1
  SIG 1 w0.2: U2.4 55.775,68.825 56.325,69.375 57.939,69.375 58.113,69.201 60.726,69.201 63.025,71.5 63.45,71.925 ; USBC1.A6 63.45,71.925 ; USBC1.B6 64.45,74.4 64.925,73.925 64.925,73.4 63.45,71.925
NetU2_5: U2.5 USBC1.A7 USBC1.B7 | length 16.5
  SIG 1 w0.2: U2.5 60.775,68.375 v1(64.075,71.675) ; USBC1.B7 62.962,75.287 62.962,72.813 v1(62.975,72.8) ; USBC1.A7 63.95,74.32 64.1,74.17 v1(64.1,73.4)
  SIG 2 w0.2: v1(62.975,72.8) 62.975,72.775 v1(64.075,71.675) 64.087,71.687 64.087,73.388 v1(64.1,73.4)
NetU2_6: U2.6 USBC1.B5 | length 11.6
  SIG 1 w0.2: U2.6 56.775,75.75 57.35,76.325 v1(59.525,76.325) ; v1(64.775,76.775) 65.45,76.1 USBC1.B5
  SIG 2 w0.2: v1(59.525,76.325) 64.325,76.325 v1(64.775,76.775)
NetU2_7: U2.7 USBC1.A5 | length 10.4
  SIG 1 w0.2: U2.7 55.775,75.85 56.975,77.05 v1(60.175,77.05) ; v1(62.4,77.05) 62.425,77.025 62.425,75.324 USBC1.A5
  SIG 2 w0.2: v1(60.175,77.05) v1(62.4,77.05)
NetUSBC2_A4B9: USBC2.A4B9 USBC2.B4A9 | length 7.9
  SIG 1 w0.2: USBC2.A4B9 74.025,74.365 75.644,72.745 77.195,72.745 78.825,74.375 USBC2.B4A9
PCIE_CLK_N: CN2.12 CN3.53 | length 54.3
  SIG 1 w0.26: CN3.53 54.175,114.15 54.119,114.094 54.119,112.767 59.536,107.35 82.391,107.35 97.244,92.497 97.244,91.746 CN2.12
PCIE_CLK_P: CN2.10 CN3.55 | length 54.3
  SIG 1 w0.26: CN3.55 53.675,114.15 53.731,114.094 53.731,112.606 59.375,106.963 82.23,106.963 96.856,92.337 96.856,91.746 CN2.10
PCIE_RX_N: CN2.18 CN3.47 | length 54.1
  SIG 1 w0.26: CN3.47 55.675,114.15 55.619,114.094 55.619,113.355 60.374,108.6 83.137,108.6 98.444,93.293 98.444,91.746 CN2.18
PCIE_RX_P: CN2.16 CN3.49 | length 54.1
  SIG 1 w0.26: CN3.49 55.175,114.15 55.231,114.094 55.231,113.195 60.214,108.213 82.977,108.213 98.056,93.133 98.056,91.746 CN2.16
PCIE_TX_N: CN2.24 CN3.41 | length 54
  SIG 1 w0.26: CN3.41 57.175,114.15 57.119,114.094 57.119,113.832 57.693,113.258 57.693,113.243 61.136,109.8 83.914,109.8 99.644,94.07 99.644,91.746 CN2.24
PCIE_TX_P: CN2.22 CN3.43 | length 54
  SIG 1 w0.26: CN3.43 56.675,114.15 56.731,114.094 56.731,113.672 57.305,113.098 57.305,113.083 60.975,109.413 83.753,109.413 99.256,93.91 99.256,91.746 CN2.22
USB_N: CN2.3 USBC2.A7 USBC2.B7 | length 31.3
  SIG 1 w0.26: USBC2.B7 75.695,75.269 75.695,75.965 75.909,76.179 76.441,76.179 76.655,75.965 ; USBC2.A7 76.675,75.749 76.731,75.805 76.731,76.34 77.629,77.237 91.625,77.237 93.825,79.437 93.825,86.285 95.656,88.117 95.656,88.654 CN2.3
USB_P: CN2.5 USBC2.A6 USBC2.B6 | length 34.4
  SIG 1 w0.2: USBC2.A6 76.225,75.199 76.225,73.367 76.342,73.25 77.1,73.25 77.225,73.375 77.225,75.199 USBC2.B6
  SIG 1 w0.26: USBC2.B6 77.175,75.749 77.119,75.805 77.119,76.179 77.789,76.85 91.785,76.85 94.212,79.277 94.212,86.125 96.044,87.956 96.044,88.654 CN2.5
pads on no net: CN1.3 CN1.4 CN1.5 CN1.6 CN1.9 CN1.10 CN1.11 CN1.12 CN1.15 CN1.16 CN1.17 CN1.18 CN1.19 CN1.20 CN1.21 CN1.24 CN1.25 CN1.26 CN1.27 CN1.28 CN1.29 CN1.30 CN1.31 CN1.34 CN1.35 CN1.36 CN1.37 CN1.38 CN1.39 CN1.40 CN1.41 CN1.44 CN1.45 CN1.46 CN1.47 CN1.48 CN1.49 CN1.50 CN1.54 CN1.56 CN1.57 CN1.58 CN1.61 CN1.62 CN1.63 CN1.64 CN1.67 CN1.68 CN1.69 CN1.70 CN1.72 CN1.73 CN1.75 CN1.76 CN1.88 CN1.89 CN1.90 CN1.91 CN1.92 CN1.94 CN1.95 CN1.96 CN1.99 CN2.1 CN2.4 CN2.6 CN2.11 CN2.28 CN2.30 CN2.34 CN2.36 CN2.40 CN2.42 CN2.43 CN2.45 CN2.46 CN2.47 CN2.48 CN2.49 CN2.51 CN2.52 CN2.53 CN2.54 CN2.57 CN2.58 CN2.59 CN2.60 CN2.63 CN2.64 CN2.65 CN2.66 CN2.69 CN2.70 CN2.71 CN2.72 CN2.75 CN2.76 CN2.77 CN2.78 CN2.81 CN2.82 CN2.83 CN2.84 CN2.87 CN2.88 CN2.89 CN2.90 CN2.93 CN2.94 CN2.95 CN2.96 CN2.99 CN2.100 CN3. CN3.1 CN3.5 CN3.6 CN3.7 CN3.8 CN3.9 CN3.10 CN3.11 CN3.12 CN3.13 CN3.14 CN3.15 CN3.16 CN3.17 CN3.18 CN3.19 CN3.20 CN3.21 CN3.22 CN3.23 CN3.24 CN3.25 CN3.26 CN3.28 CN3.29 CN3.30 CN3.31 CN3.32 CN3.34 CN3.35 CN3.36 CN3.37 CN3.38 CN3.40 CN3.42 CN3.44 CN3.46 CN3.48 CN3.54 CN3.56 CN3.58 CN3.67 CN3.68 CN3.69 CN3.75 CN3.76 CN4.0 U1.5 U2.2 U2.3 U2.10 U3.5 U8.4 U8.5 USBC1. USBC1.A8 USBC1.B8 USBC2. USBC2.A8 USBC2.B8

## Polygon pours and split planes (outlines as drawn)
GND on GND (split plane): 126.915,67.485 27.91,67.485 27.91,126.49 126.915,126.49
5V on PWR (split plane): 126.915,67.485 27.91,67.485 27.91,126.49 126.915,126.49

## Other copper
SIG 1:
  region net GND: 79.125,74.599 79.125,75.899 78.525,75.899 78.525,74.599 78.825,74.599
  region net GND: 73.525,74.599 73.525,75.899 73.225,75.899 72.925,75.899 72.925,74.599 73.225,74.599
  region net GND: 66.4,74.649 66.4,75.949 65.8,75.949 65.8,74.649 66.1,74.649
  region net GND: 60.8,74.649 60.8,75.949 60.5,75.949 60.2,75.949 60.2,74.649 60.5,74.649

## Silkscreen, mask and mechanical layers (free items; w line width, h text height)
Mechanical 13:
  lines w0.15: 27.4,67 27.4,127 127.4,127

## Dimensions
131.952,126.7 to 130.377,84.7 on SIG 1
46.778,127.3 to 68.778,127.3 on SIG 1
127.582,86.885 to 127.582,126.885 on SIG 1
72.46,127.3 to 127.46,127.275 on SIG 1
127.425,127.025 to 27.4,127 on SIG 1
27.4,127 to 27.4,66.975 on SIG 1